# Altium PCB PCB1.PcbDoc (part 1 of 2)
Units mm, origin at the board's own origin, x right, y up, seen from the top; angles counter-clockwise.
Board outline 124.84 x 79.12 mm, 2 copper layers (Top Layer, Bottom Layer); 83 components, 68 nets, 287 pads, 46 vias.
Unrouted connection lines stored in the file: 3.
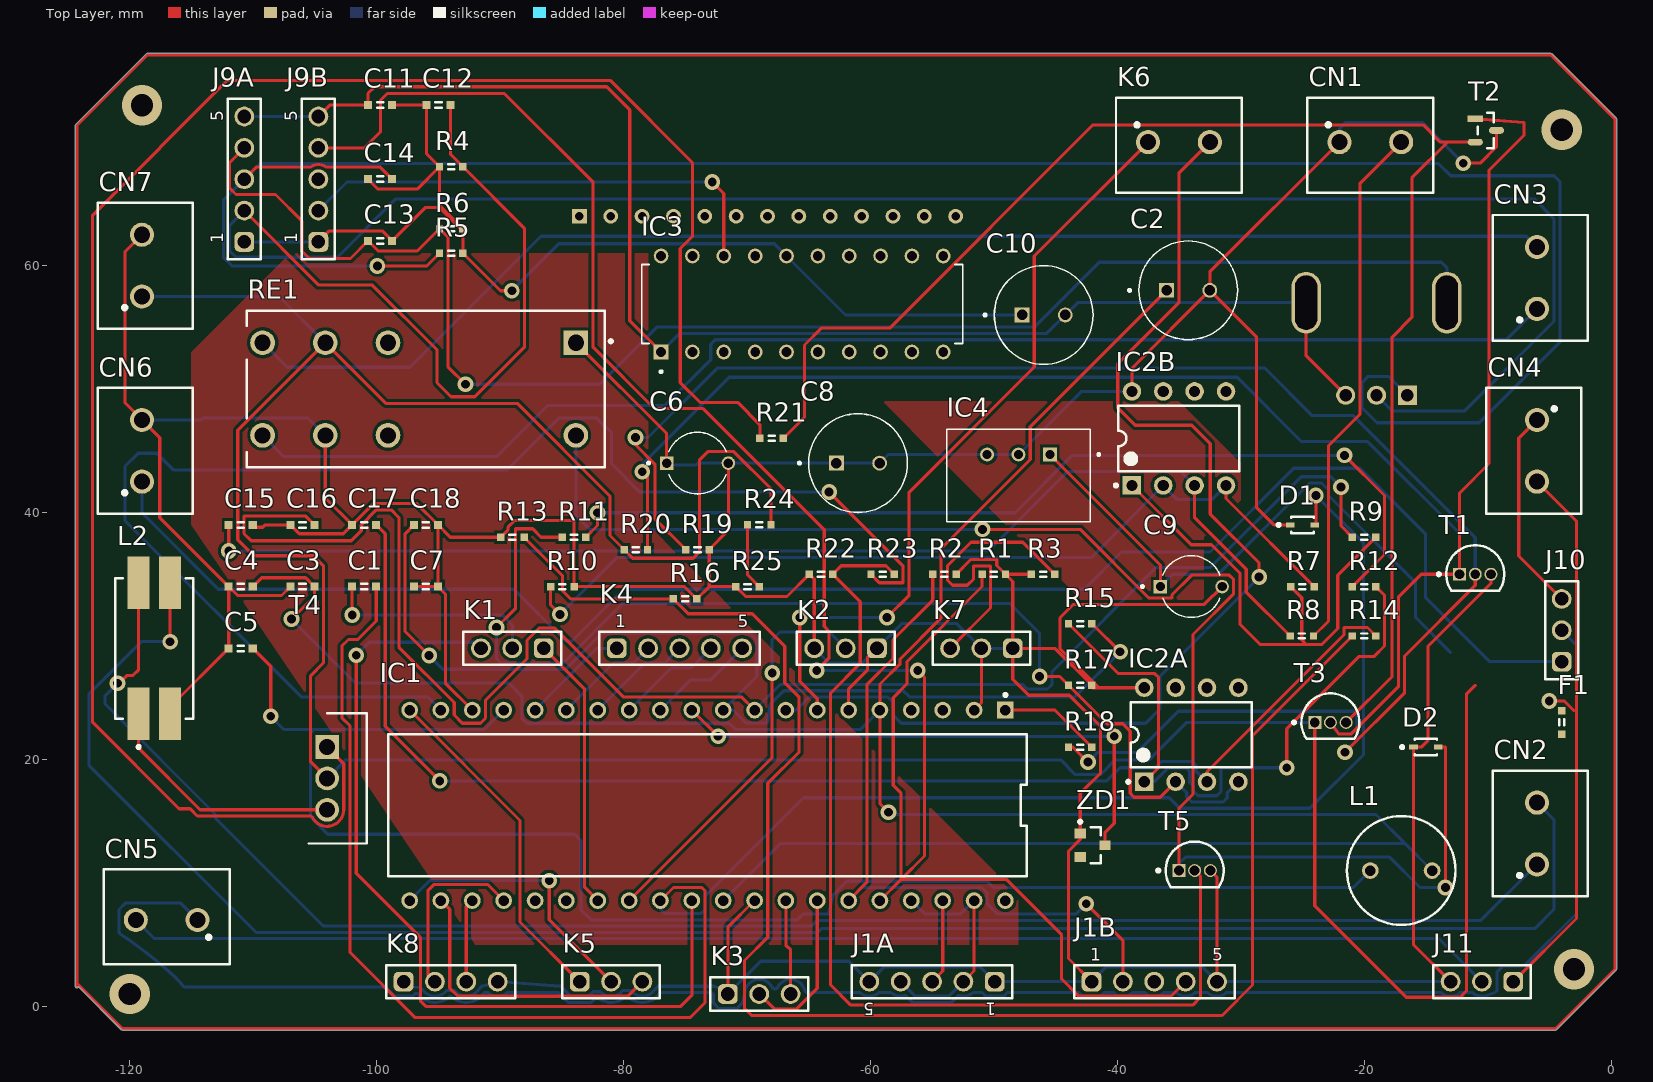
[diagram p0: Top Layer view]
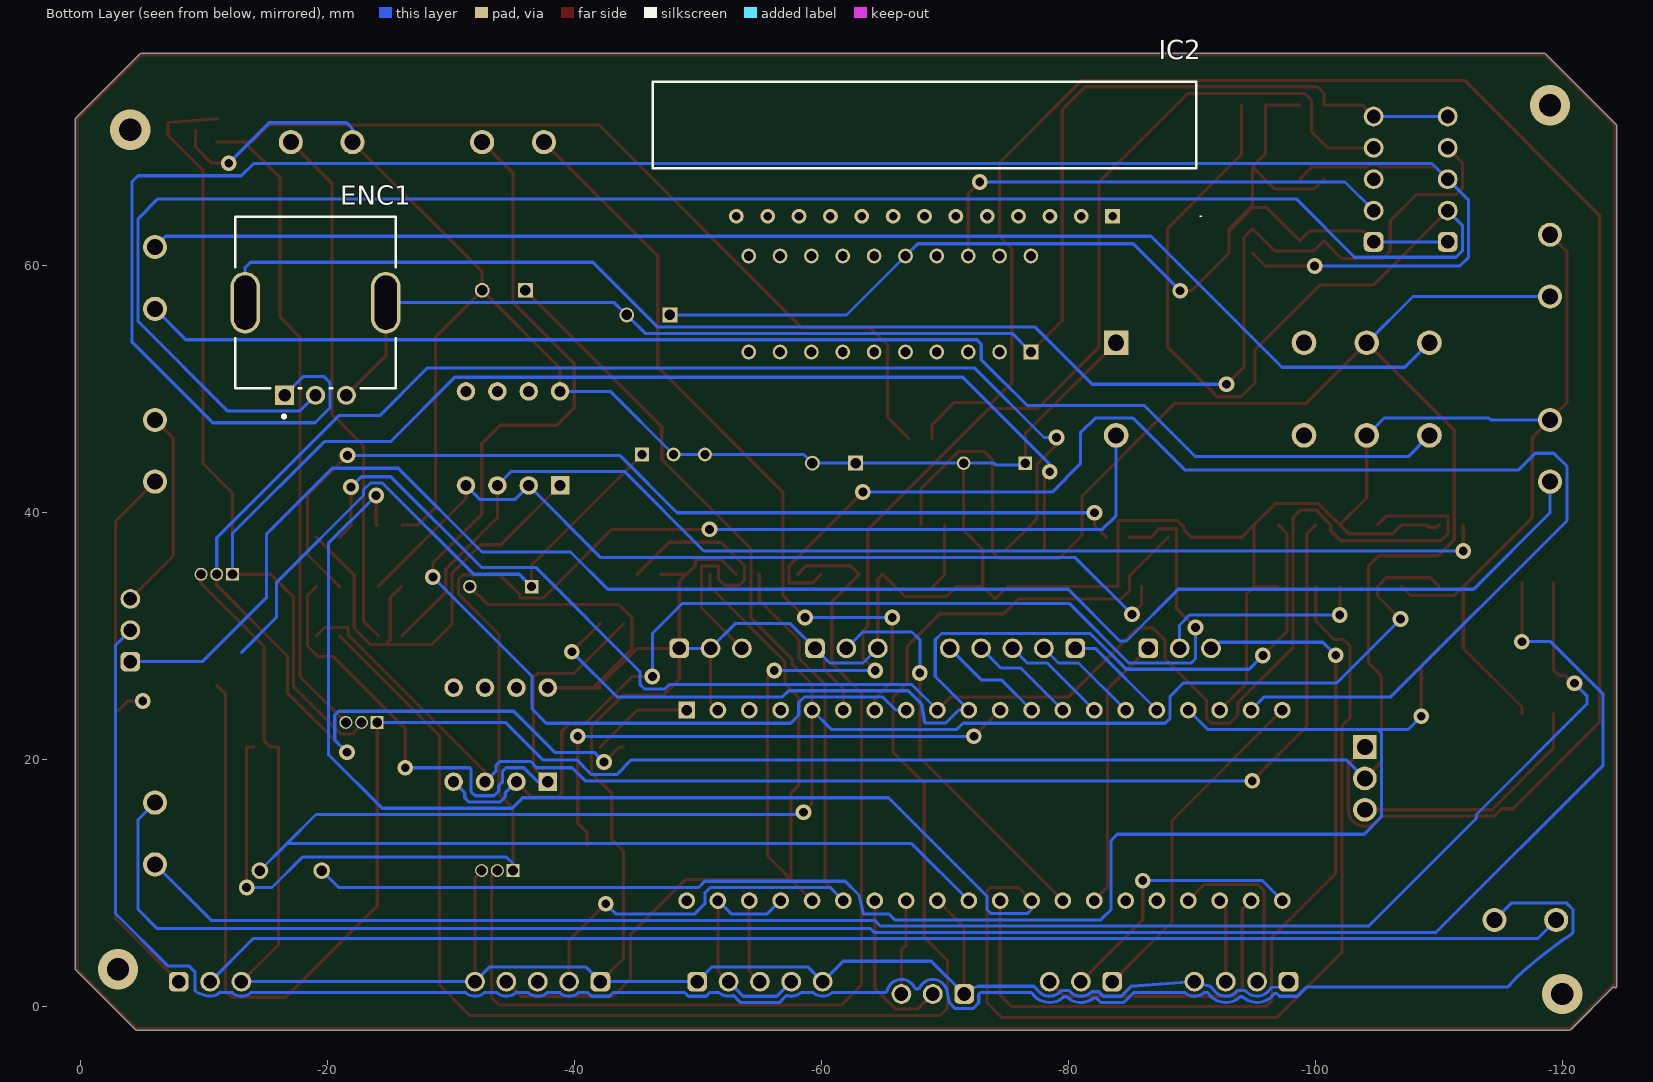
[diagram p1: Bottom Layer view, seen from below]
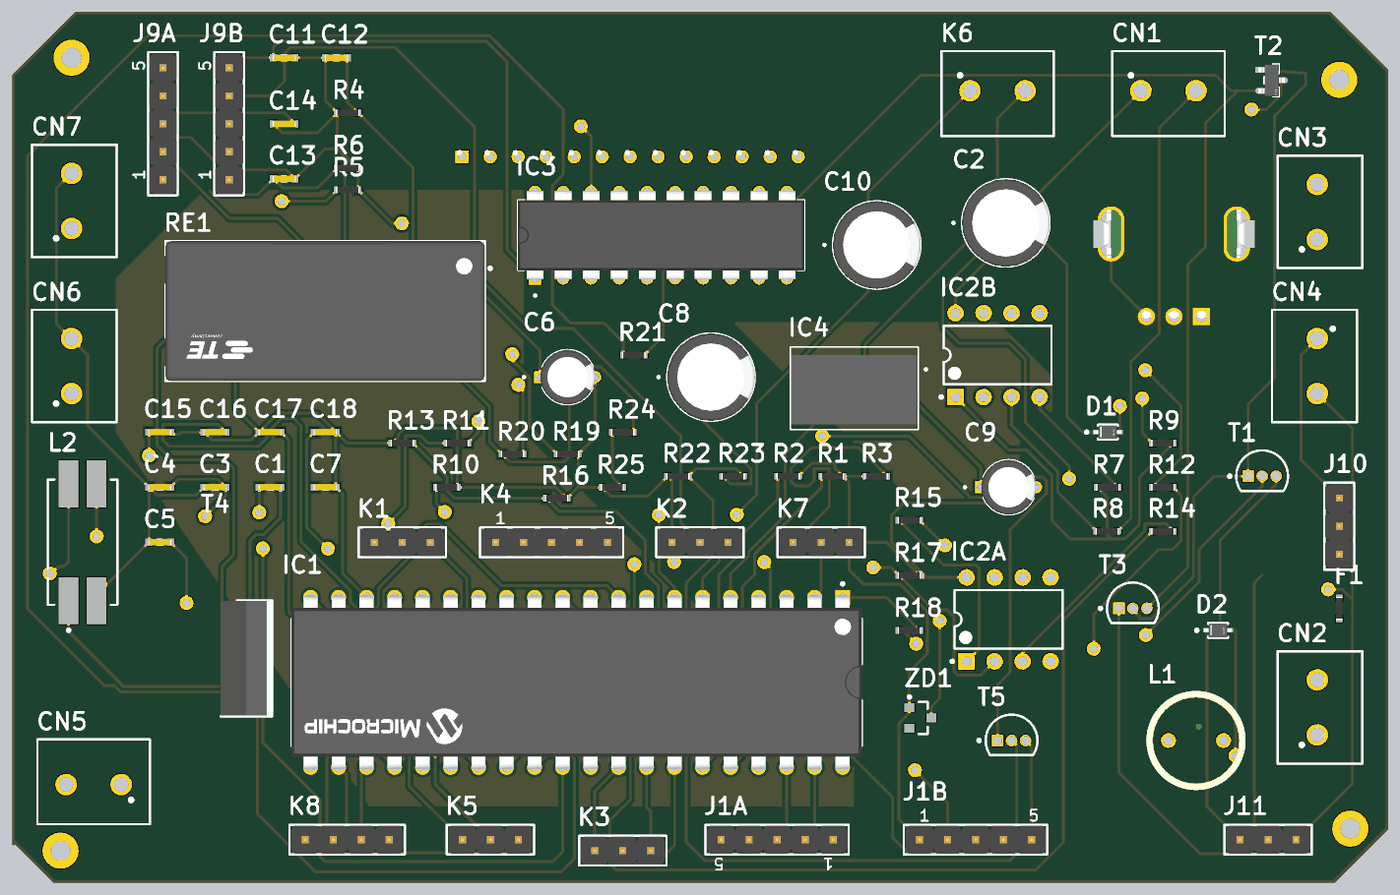
[diagram p2: 3D render of the assembled board from above, using the file's embedded part models]

## Layer stack, top to bottom
Top Solder: solder mask 0.0102, Solder Resist, Dk 3.5
Top Layer: signal copper 0.0356
Dielectric 1: dielectric 0.32, FR-4, Dk 4.8
Bottom Layer: signal copper 0.0356
Bottom Solder: solder mask 0.0102, Solder Resist, Dk 3.5

## Board outline
-124.392,1.625 ccw(c-124.265,1.625) -124.146,1.58 -120.672,-1.894 -120.582,-1.931 -4.504,-1.931 -4.414,-1.894 0.412,2.932 0.449,3.022 0.449,71.856 0.412,71.946 -4.795,77.153 -4.885,77.19 -118.55,77.19 -118.64,77.153 -124.355,71.438 -124.392,71.348

## Design rules (kind name [scope] priority, off if disabled: settings)
AcuteAngle AcuteAngle_1 [All] p1: minimum=0.00000000000000E+0000 checktracksonly=FALSE
BackDrilling BackDrilling_1 [All] p1: maxstublength=0.381 usetopbackdrill=TRUE usebottombackdrill=TRUE holeoversize=0.025 holetolplus=0 holetolminus=0
BoardOutlineClearance BoardOutlineClearance_1 [All] p1: gap=0.254 ignorepadtopadclearanceinfootprint=FALSE except(0: Arc-SplitContinuation Track-SplitContinuation SMDPad-SplitContinuation THPad-SplitContinuation Via-SplitContinuation Fill-SplitContinuation Poly-SplitContinuation Region-SplitContinuation Text-SplitContinuation)
Clearance Clearance_1 [All] p1: gap=0.254 ignorepadtopadclearanceinfootprint=TRUE except(0: Arc-Hole Track-Hole SMDPad-Hole THPad-Hole Via-Hole Fill-Hole Poly-Hole Region-Hole Text-Hole Hole-Hole)
Clearance Clearance_1 [OnMid vs OnMid] p2: gap=0.254 ignorepadtopadclearanceinfootprint=FALSE sourcerule=77 cellrowname=All cellrowtype=0 cellcolname=All cellcoltype=0 innerlayers=TRUE
Clearance Clearance_2 [(ExistsOnLayer('Top Layer') Or ExistsOnLayer('Bottom Layer')) vs (ExistsOnLayer('Top Layer') Or ExistsOnLayer('Bottom Layer'))] p3: gap=0.254 ignorepadtopadclearanceinfootprint=FALSE sourcerule=77 cellrowname=All cellrowtype=0 cellcolname=All cellcoltype=0 outerlayers=TRUE
Clearance [All] p4: gap=0.254 ignorepadtopadclearanceinfootprint=FALSE ismatrix=TRUE
ComponentClearance ComponentClearance_1 [All] p1: gap=0.254 collisioncheckmode=3 verticalgap=0.254 showdistances=FALSE
ComponentClearance [All] p2: gap=0.04 collisioncheckmode=3 verticalgap=0.254 showdistances=FALSE
ComponentOrientations ComponentRotations_1 [All] p1: allowedrotations=1
Creepage Creepage_1 [All] p1: checkdistance=0.254 applytopolygonpour=TRUE
FlightTimeFalling FlightTimeFallingEdge_1 [All] p1: maximum=1.000n
FlightTimeRising FlightTimeRisingEdge_1 [All] p1: maximum=1.000n
Length MaxMinLength_1 [All] p1: maxlimit=2540 minlimit=0
MatchedLengths MatchedLengths_1 [All] p1: tolerance=0 checknetsindiffpair=FALSE checkdiffpairvsdiffpair=TRUE checkxsignals=TRUE checkothers=TRUE
MaxMinImpedance MaxMinImpedance_1 [All] p1: minimum=1.000 maximum=10.00
MaximumViaCount MaximumViaCount_1 [All] p1: limit=1000
MinimumAnnularRing MinimumAnnularRing_1 [All] p1: minimumring=0.254
NetsToIgnore NetsToIgnore_1 [All] p1:
OvershootFalling OvershootFallingEdge_1 [All] p1: maximum=1.000
OvershootRising OvershootRisingEdge_1 [All] p1: maximum=1.000
ParallelSegment ParallelSegment_1 [All] p1: limit=0 gap=0
PermittedLayers PermittedLayers_1 [All] p1: toplayerpermitted=TRUE bottomlayerpermitted=TRUE
PlaneClearance PowerPlaneClearance_1 [All] p1: clearance=0
PlaneClearance [All] p2: clearance=0.508
PolygonConnect PolygonConnectStyle_1 [All] p1: thpad.connectstyle=Relief thpad.reliefconductorwidth=0.254 thpad.reliefentries=2 thpad.polygonreliefangle="0 Angle" thpad.airgapwidth=0.254 smdpad.connectstyle=Relief smdpad.reliefconductorwidth=0.254 smdpad.reliefentries=2 smdpad.polygonreliefangle="0 Angle" smdpad.airgapwidth=0.254 via.connectstyle=Direct via.reliefconductorwidth=0.254 via.reliefentries=2 via.polygonreliefangle="0 Angle" via.airgapwidth=0.254
PolygonConnect [All] p2: connectstyle=Relief reliefconductorwidth=0.254 reliefentries=4 polygonreliefangle="90 Angle" airgapwidth=0.254
ReturnPath ReturnPath_1 [All] p1: _gaplimit=0
RoomDefinition Display [InComponentClass('Display')] p1: confinementstyle=ConfineIn formatcopy=TRUE lockcomponents=FALSE outline -113.71,27 -11,27 -11,77 -113.71,77
RoutingVias RoutingViaStyle_1 [All] p1: holewidth=0.6 width=1.1 viastyle="Through Hole" minholewidth=0.6 minwidth=1.1 maxholewidth=0.6 maxwidth=1.1
RoutingVias [All] p2: holewidth=0.711 width=1.27 viastyle="Through Hole" minholewidth=0.711 minwidth=1.27 maxholewidth=0.711 maxwidth=1.27
SMDEntry SMDPADEntry_1 [All] p1: side=TRUE corner=TRUE anyangle=FALSE
SMDNeckDown SMDNeckDown_1 [All] p1: percent=50.000
SMDToCorner SMDToCorner_1 [All] p1: distance=0
SMDToPlane SMDToPlane_1 [All] p1: distance=0
SignalBaseValue SignalBaseValue_1 [All] p1: maximum=0.000
SignalStimulus SignalStimulus_1 [All] p1: kind=0 level=0 starttime=0.000 stoptime=0.000 periodtime=0.000
SignalTopValue SignalTopValue_1 [All] p1: minimum=5.000
SlopeFalling MaxSlopeFallingEdge_1 [All] p1: maxslope=1.000n
SlopeRising MaxSlopeRisingEdge_1 [All] p1: maxslope=0.000
SolderMaskExpansion [All] p1: expansion=0.102 istentingtop=FALSE
StubLength DaisyChainStubLength_1 [All] p1: limit=25.4
SupplyNets SupplyNets_1 [All] p1: voltage=0.000
UnConnectedPin UnconnectedPin_1 [All] p1:
UndershootFalling UndershootFallingEdge_1 [All] p1: maximum=1.000
UndershootRising UndershootRisingEdge_1 [All] p1: maximum=1.000
ViasUnderSMD ViasUnderSMD_1 [All] p1: allowed=FALSE
Width MaxMinWidth_2 [All] p1: maxlimit=0.508 minlimit=0.508 preferedwidth=0.508 minimp=50.000000 maximp=50.000000 favimp=50.000000
Width MaxMinWidth_1 [All] p2: maxlimit=0.254 minlimit=0.254 preferedwidth=0.254
Width [All] p3: maxlimit=0.254 minlimit=0.254 preferedwidth=0.254
28 further rules are at their usual default settings.

## Classes and differential pairs
component class TermoCouple: C15 C16 C17 C18 CN1 IC2A IC2B R7 R8 R9 R10 R11 R12 R13 R14 R15 R16 R17
component class PWU: CN2 L2 R18 R19 R20 R21 T1 T2 T3 T4
component class PowerSupply: C8 C9 CN3 CN4 CN5 CN6 CN7 D2 F1 IC4 J10 J11 R22 R23 R24 R25 RE1 T5 ZD1
component class Display: C10 C11 C12 C13 C14 ENC1 IC2 IC3 J9A J9B R4 R5 R6
component class CPU: C1 C2 C3 C4 C5 C6 C7 D1 IC1 J1A J1B K1 K2 K3 K4 K5 K6 K7 K8 L1 R1 R2 R3

## Components (designator, comment, footprint, x,y, rotation, side; value= is the part's Value field where it differs from the comment)
C1 "100nF" CAP_0805 -101,34 r0 top
C2 "10uF" CAPPRD350W60D800H1150 -34.25,58 r0 top
C3 "100nF" CAP_0805 -106,34 r0 top
C4 "100nF" CAP_0805 -111,34 r0 top
C5 "100nF" CAP_0805 -111,29 r0 top
C6 "10uF 50v" CAPPRD500W50D500H1100 -74,44 r0 top
C7 "CAP_0805" CAP_0805 -96,34 r0 top
C8 "10uF 50V" CAPPRD350W60D800H1150 -61,44 r0 top
C9 "100uF 25V" CAPPRD500W50D500H1100 -34,34 r0 top
C10 "100uF" CAPPRD350W60D800H1150 -45.96,56 r0 top
C11 "100n" CAP_0805 -99.71,73 r0 top
C12 "10n" CAP_0805 -94.975,73 r180 top
C13 "10n" CAP_0805 -99.71,62 r180 top
C14 "10n" CAP_0805 -99.71,67 r180 top
C15 "10n" CAP_0805 -111,39 r180 top
C16 "10n" CAP_0805 -106,39 r180 top
C17 "10n" CAP_0805 -101,39 r180 top
C18 "10n" CAP_0805 -96,39 r180 top
CN1 "connecters 2pins" "conncecto 2 pins" -19.5,70 r0 top
CN2 "connecters 2pins" "conncecto 2 pins" -6,14 r90 top
CN3 "connecters 2pins" "conncecto 2 pins" -6,59 r90 top
CN4 "connecters 2pins" "conncecto 2 pins" -6,45 r270 top
CN5 "connecters 2pins" "conncecto 2 pins" -117,7 r180 top
CN6 "connecters 2pins" "conncecto 2 pins" -119,45 r90 top
CN7 "connecters 2pins" "conncecto 2 pins" -119,60 r90 top
D1 "1N4148WSF-7" FP-SOD323F-MFG -25,39 r0 top
D2 "1N4007" FP-SOD323F-MFG -15,21 r0 top
ENC1 "PEC11R-4015F-N0024" FP-PEC11R-4015F-N0024-MFG -19,57 r180 bottom
F1 "RES_0805" RES_0805 -4,23 r90 top
IC1 "ATMEGA4809-PF" FP-C04-016-MFG -73.19,16.285 r270 top
IC2 "KW4-801AVB" LTC46454G -83.57,64 r0 bottom
IC2A "MCP6002-E/P" PDIP300-P8 -34,22 r90 top
IC2B "MCP6002-E/P" PDIP300-P8 -35,46 r90 top
IC3 "TM1637" DIP778W43P254L2612H431Q20N -65.52,56.89 r90 top
IC4 "DC/DC converters" CONV_TSR_1-2450E -48,43 r180 top
J1A "61300511121" 61300511121 -55,2 r180 top
J1B "61300511121" 61300511121 -37,2 r0 top
J9A "61300511121" 61300511121 -110.71,67 r90 top
J9B "61300511121" 61300511121 -104.71,67 r90 top
J10 "61300311121" 61300311121 -4,30.46 r90 top
J11 "61300311121" 61300311121 -10.46,2 r180 top
K1 "61300311121" 61300311121 -89,29 r180 top
K2 "61300311121" 61300311121 -62,29 r180 top
K3 "61300311121" 61300311121 -69,1 r0 top
K4 "61300511121" 61300511121 -75.46,29 r0 top
K5 "61300311121" 61300311121 -81,2 r0 top
K6 "connecters 2pins" "conncecto 2 pins" -35,70 r0 top
K7 "61300311121" 61300311121 -51,29 r180 top
K8 "61300411121" 61300411121 -94,2 r0 top
L1 "RFB0807-103L" COIL-RFB0807-2_V -17,11 r0 top
L2 "CM2545X171R-10" LIRD-CM2545X171R-10_V -118,29 r90 top
R1 "4k7" RES_0805 -50,35 r0 top
R2 "4k7" RES_0805 -54,35 r0 top
R3 "4k7" RES_0805 -46,35 r0 top
R4 "10k" RES_0805 -93.95,68 r0 top
R5 "10k" RES_0805 -93.95,61 r0 top
R6 "10k" RES_0805 -93.95,63 r0 top
R7 "18k" RES_0805 -25,34 r0 top
R8 "5k6" RES_0805 -25.05,30 r0 top
R9 "5k6" RES_0805 -20,38 r0 top
R10 "100E" RES_0805 -84.95,34 r180 top
R11 "18k" RES_0805 -84,38 r180 top
R12 "18k" RES_0805 -20,34 r180 top
R13 "1M" RES_0805 -89,38 r180 top
R14 "5k6" RES_0805 -20,30 r180 top
R15 "5k6" RES_0805 -43,31 r180 top
R16 "10M" RES_0805 -75,33 r180 top
R17 "100E" RES_0805 -43,26 r180 top
R18 "10k" RES_0805 -43,21 r180 top
R19 "4.7k" RES_0805 -74,37 r180 top
R20 "4.7k" RES_0805 -79,37 r180 top
R21 "100E" RES_0805 -68,46 r180 top
R22 "4.7k" RES_0805 -64,35 r180 top
R23 "10k" RES_0805 -59,35 r180 top
R24 "6.8k" RES_0805 -69,39 r180 top
R25 "10k" RES_0805 -69.95,34 r180 top
RE1 "RT424005F" FP-RT424005F-MFG -96,50 r180 top
T1 "BC547CG" ONSC-TO-92-3-29-11 -11,35 r0 top
T2 "BCV26" FP-318-IPC_C -10.14,70.95 r0 top
T3 "BC547CG" ONSC-TO-92-3-29-11 -22.73,23 r0 top
T4 "Mosfet" TO254P469X1042X1967-3P -104,21 r270 top
T5 "BC847B" ONSC-TO-92-3-29-11 -33.73,11 r0 top
ZD1 "5V1" ONSC-SOT-23-3-318-08_V -42,13.05 r0 top

## Footprints (in the part's own frame and the unit in brackets; to place one, negate y for a bottom-side part, rotate by r counter-clockwise, add the part's x,y. Pads: shape width x height; smd on the part's side, far side on the other; paste and mask are expansions set on the pad)
61300311121 [mm] "Pin Header, pitch 2.54 mm, THT, Vertical, single row, 3p"
  rrect50% 1.6x1.6 hole 1.1: 1(-2.54,0)
  round 1.6 hole 1.1: 2(0,0) 3(2.54,0)
  silkscreen extent -3.96,-1.35 3.96,1.34, body extent -3.81,-1.27 3.81,1.27, height 8.57
61300411121 [mm] "Pin Header, pitch 2.54 mm, THT, Vertical, single row, 4p"
  rrect50% 1.6x1.6 hole 1.1: 1(-3.81,0)
  round 1.6 hole 1.1: 2(-1.27,0) 3(1.27,0) 4(3.81,0)
  silkscreen extent -5.23,-1.34 5.23,1.34, body extent -5.08,-1.27 5.08,1.27, height 8.57
61300511121 [mm] "Pin Header, pitch 2.54 mm, THT, Vertical, single row, 5p"
  rrect50% 1.6x1.6 hole 1.1: 1(-5.08,0)
  round 1.6 hole 1.1: 2(-2.54,0) 3(0,0) 4(2.54,0) 5(5.08,0)
  silkscreen extent -6.5,-1.34 6.5,1.34, body extent -6.35,-1.27 6.35,1.27, height 8.57
CAP_0805 [mm] "Chip Capacitor, 2-Leads, Body 2.00x0.50mm, IPC Medium Density"
  rect 0.65x0.65 smd: 1(-0.975,0) 2(0.975,0)
  silkscreen extent -0.25,-0.23 0.25,0.22, body extent -1.05,-0.3 1.05,0.3, height 0.6
CAPPRD350W60D800H1150 [mm]
  round 1.2 hole 0.85: N(1.75,0)
  rect 1.2x1.2 hole 0.85: P(-1.75,0)
  silkscreen extent -4.85,-4 4,4, body extent -4,-4 4,4, height 11.5
CAPPRD500W50D500H1100 [mm]
  round 1.1 hole 0.75: N(2.5,0)
  rect 1.1x1.1 hole 0.75: P(-2.5,0)
  silkscreen extent -4.06,-2.5 2.32,2.5, body extent -2.75,-2.5 2.75,2.5, height 11
COIL-RFB0807-2_V [mm] "Radial Leaded, 2-Leads, Dia 8.8mm, Height 7.5mm, Pin Spacing 5mm"
  round 1.35 hole 0.85: 1(-2.5,0) 2(2.5,0)
  silkscreen extent -4.4,-4.4 4.4,4.4, body extent -4.41,-4.41 4.41,4.41, height 7.5
"conncecto 2 pins" [mm]
  round 1.95 hole 1.3: 1(-2.5,0) 2(2.5,0)
  silkscreen extent -5.1,-4.1 5.1,3.6
CONV_TSR_1-2450E [mm]
  rect 1.13x1.13 hole 0.73: 1(-2.54,-1.7)
  round 1.13 hole 0.73: 2(0,-1.7) 3(2.54,-1.7)
  silkscreen extent -6.6,-3.75 5.8,3.75, body extent -5.69,-3.02 5.69,3.28, height 9.6
DIP778W43P254L2612H431Q20N [mm]
  rect 1.19x1.19 hole 0.79: 1(-3.89,11.43)
  round 1.19 hole 0.79: 2(-3.89,8.89) 3(-3.89,6.35) 4(-3.89,3.81) 5(-3.89,1.27) 6(-3.89,-1.27) 7(-3.89,-3.81) 8(-3.89,-6.35) 9(-3.89,-8.89) 10(-3.89,-11.43) 11(3.89,-11.43) 12(3.89,-8.89) 13(3.89,-6.35) 14(3.89,-3.81) 15(3.89,-1.27) 16(3.89,1.27) 17(3.89,3.81) 18(3.89,6.35) 19(3.89,8.89) 20(3.89,11.43)
  silkscreen extent -5.58,-13 3.2,13, body extent -4.03,-13 4.03,13, height 4.31
FP-318-IPC_C [mm]
  rect 1.224x0.538 smd paste+0 mask+0: 1(-0.86,0.95)
  rrect100% 1.224x0.538 smd paste+0 mask+0: 2(-0.86,-0.95) 3(0.86,0)
  silkscreen extent -0.65,-1.45 0.65,1.45, body extent -1.57,-1.55 1.57,1.55, height 0.25
FP-C04-016-MFG [mm]
  rect 1.35x1.35 hole 0.85 paste-2539.97 mask+0: 1(-7.715,24.13)
  round 1.35 hole 0.85 paste-2539.97 mask+0: 2(-7.715,21.59) 3(-7.715,19.05) 4(-7.715,16.51) 5(-7.715,13.97) 6(-7.715,11.43) 7(-7.715,8.89) 8(-7.715,6.35) 9(-7.715,3.81) 10(-7.715,1.27) 11(-7.715,-1.27) 12(-7.715,-3.81) 13(-7.715,-6.35) 14(-7.715,-8.89) 15(-7.715,-11.43) 16(-7.715,-13.97) 17(-7.715,-16.51) 18(-7.715,-19.05) 19(-7.715,-21.59) 20(-7.715,-24.13) 21(7.715,-24.13) 22(7.715,-21.59) 23(7.715,-19.05) 24(7.715,-16.51) 25(7.715,-13.97) 26(7.715,-11.43) 27(7.715,-8.89) 28(7.715,-6.35) 29(7.715,-3.81) 30(7.715,-1.27) 31(7.715,1.27) 32(7.715,3.81) 33(7.715,6.35) 34(7.715,8.89) 35(7.715,11.43) 36(7.715,13.97) 37(7.715,16.51) 38(7.715,19.05) 39(7.715,21.59) 40(7.715,24.13)
  silkscreen extent -9.07,-25.88 5.76,25.88, body extent -8.49,-26.71 8.49,26.71, height 0.25
FP-PEC11R-4015F-N0024-MFG [mm]
  rrect100% 2.4x5 hole 4.4 slot 1.8 at 0 deg paste-2539.97 mask+0: 1(-5.7,0) 2(5.7,0)
  rect 1.55x1.55 hole 1 paste-2539.97 mask+0: A(-2.5,-7.5)
  round 1.55 hole 1 paste-2539.97 mask+0: B(2.5,-7.5) C(0,-7.5)
  silkscreen extent -6.5,-9.35 6.5,6.95, body extent -7.33,-7.7 7.33,6.6, height 22.3
FP-RT424005F-MFG [mm]
  round 2 hole 1.3 paste-2539.97 mask+0: 11(8.15,-3.75) 12(3.07,-3.75) 14(13.23,-3.75) 21(8.15,3.75) 22(3.07,3.75) 24(13.23,3.75) A2(-12.15,3.75)
  rect 2x2 hole 1.3 paste-2539.97 mask+0: A1(-12.15,-3.75)
  silkscreen extent -15.1,-6.35 14.5,6.35, body extent -14.6,-6.45 14.6,6.45, height 0.25
FP-SOD323F-MFG [mm]
  rect 0.71x0.403 smd paste+0 mask+0: 1(-0.995,0) 2(0.995,0)
  silkscreen extent -2.05,-0.67 0.9,0.68, body extent -1.45,-0.77 1.45,0.77, height 0.25
LIRD-CM2545X171R-10_V [mm] "SMD, 4-Leads, Body 11.38x6.3mm"
  rect 4.27x1.78 smd: 1(-5.305,1.27) 2(-5.305,-1.27) 3(5.305,-1.27) 4(5.305,1.27)
  silkscreen extent -8.11,-3.15 5.69,3.15, body extent -5.69,-3.15 5.69,3.15, height 10.16
LTC46454G [mm]
  rect 1.2x1.2 hole 0.7: 1(0,0)
  round 1.2 hole 0.7: 2(2.54,0) 3(5.08,0) 4(7.62,0) 5(10.16,0) 6(12.7,0) 7(15.24,0) 8(17.78,0) 9(20.32,0) 10(22.86,0) 11(25.4,0) 12(27.94,0) 13(30.48,0)
  silkscreen extent -7.2,-10.9 37.24,0.05, body extent -7.01,-11.28 36.99,-0.13, height 16.35
ONSC-SOT-23-3-318-08_V [mm] "SOT23, 3-Leads, Body 2.92x1.3mm, Pitch 0.95mm"
  rect 0.9x0.8 smd: 1(-1,0.95) 2(-1,-0.95) 3(1,0)
  silkscreen extent -1.12,-1.46 0.65,2.02, body extent -0.65,-1.46 0.65,1.46, height 1.11
ONSC-TO-92-3-29-11 [mm] "TO, 3-Leads, Body Dia 4.7mm, Pitch 1.27mm"
  rect 1.05x1.05 hole 0.8: 1(-1.27,0)
  round 1.05 hole 0.8: 2(0,0) 3(1.27,0)
  silkscreen extent -3.07,-1.34 2.35,2.35, body extent -2.35,-1.33 2.36,2.36, height 7.87
PDIP300-P8 [mm] "8-Pin Plastic Dual In-Line Package (PDIP)"
  rect 1.5x1.5 hole 0.9: 1(-3.81,3.81)
  round 1.5 hole 0.9: 2(-3.81,1.27) 3(-3.81,-1.27) 4(-3.81,-3.81) 5(3.81,-3.81) 6(3.81,-1.27) 7(3.81,1.27) 8(3.81,3.81)
  silkscreen extent -3.93,-4.9 2.65,5.23, body extent -3.55,-4.9 3.55,4.9, height 4.32
RES_0805 [mm] "Chip Resistor, 2-Leads, Body 2.00x0.50mm, IPC Medium Density"
  rect 0.6x0.6 smd: 1(-0.95,0) 2(0.95,0)
  silkscreen extent -0.25,-0.2 0.25,0.2, body extent -1.05,-0.3 1.05,0.3, height 0.6
TO254P469X1042X1967-3P [mm]
  rect 1.92x1.92 / inner round 1.92 / far side rect 1.92x1.92 hole 1.28: 1(0,0)
  round 1.92 hole 1.28: 2(2.54,0) 3(5.08,0)
  silkscreen extent -2.73,-1.5 7.81,3.19, body extent -10,-3.38 10,3.38, height 5.8

## Part data
C1 C3 C4 C5 C11 C12 C13 C14 C15 C16 C17 C18: library part CAP_0805, "Capacitor SMD 0805 generic."
C2 C8 C10: library part Capacitor, "Capacitor 100 μF, 50 V, steek 3,5 mm, 8x11 mm, generic."
C6 C9: library part Capacitor_1, "Capacitor, 10 μF, 50 V, steek 2 mm, 5x11 mm, generic."
C7: "Capacitor SMD 0805 generic."
CN1 CN2 CN3 CN4 CN5 CN6 CN7 K6: library part pins, "printkroonsteen 5,08 mm,"
D1: "Rectifier Diode, 1 Phase, 1 Element, 0.25A, 100V V(RRM), Silicon", Manufacturer=Diodes, Max Operating Temperature=150°C, Max Output current=250mA, Max Power Dissipation=400mW, Min Operating Temperature=-55°C, Package Body Material=Plastic, Package Shape=Rectangular, Package Style="SMALL OUTLINEMeter", Rep Pk Reverse Voltage-Max=100V, Supplier Part Number=4050038, Category="Rectifier Diodes", ComponentLink1Description=https://datasheet.ciiva.com:443/pdfs/VipMasterIC/IC/DIOD/DIODS20288/DIODS20288-1.pdf?src-supplier=IHS+Markit, ComponentLink1URL=https://datasheet.ciiva.com:443/pdfs/VipMasterIC/IC/DIOD/DIODS20288/DIODS20288-1.pdf?src-supplier=IHS+Markit, ComponentLink2Description=https://datasheet.ciiva.com/29592/1n4148wsf-29592065.pdf?src-supplier=Digikey, ComponentLink2URL=https://datasheet.ciiva.com/29592/1n4148wsf-29592065.pdf?src-supplier=Digikey, Diode Element Material=SILICON, Diode Type=RECTIFIER, JESD-30 Code=R-PDSO-F2, JESD-609 Code=e3, Manufacturer Part Number=1N4148WSF-7, Number of Elements=1, Pins=2, Pricing="3000=0.0178, 12000=0.0171, 45000=0.0164, 90000=0.0161, 225000=0.0153 (USD)", Reach SVHC Compliant=Yes, Reverse Recovery Time-Max=0.004us, RoHS=Yes, RoHS Compliant=Yes, Stock=36000, Supplier="Future Electronics", Surface Mount=Yes, Terminal Finish=Tin, Terminal Form=Flat, Terminal Position=DUAL
D2: library part 1N4148WSF-7, "Rectifier Diode, 1 Phase, 1 Element, 0.25A, 100V V(RRM), Silicon", Manufacturer=Diodes, Max Operating Temperature=150°C, Max Output current=250mA, Max Power Dissipation=400mW, Min Operating Temperature=-55°C, Package Body Material=Plastic, Package Shape=Rectangular, Package Style="SMALL OUTLINEMeter", Rep Pk Reverse Voltage-Max=100V, Supplier Part Number=4050038, Category="Rectifier Diodes", ComponentLink1Description=https://datasheet.ciiva.com:443/pdfs/VipMasterIC/IC/DIOD/DIODS20288/DIODS20288-1.pdf?src-supplier=IHS+Markit, ComponentLink1URL=https://datasheet.ciiva.com:443/pdfs/VipMasterIC/IC/DIOD/DIODS20288/DIODS20288-1.pdf?src-supplier=IHS+Markit, ComponentLink2Description=https://datasheet.ciiva.com/29592/1n4148wsf-29592065.pdf?src-supplier=Digikey, ComponentLink2URL=https://datasheet.ciiva.com/29592/1n4148wsf-29592065.pdf?src-supplier=Digikey, Diode Element Material=SILICON, Diode Type=RECTIFIER, JESD-30 Code=R-PDSO-F2, JESD-609 Code=e3, Manufacturer Part Number=1N4148WSF-7, Number of Elements=1, Pins=2, Pricing="3000=0.0178, 12000=0.0171, 45000=0.0164, 90000=0.0161, 225000=0.0153 (USD)", Reach SVHC Compliant=Yes, Reverse Recovery Time-Max=0.004us, RoHS=Yes, RoHS Compliant=Yes, Stock=36000, Supplier="Future Electronics", Surface Mount=Yes, Terminal Finish=Tin, Terminal Form=Flat, Terminal Position=DUAL
ENC1: library part CMP-07421-000003-1, "ROTARY ENCODER MECHANICAL 24PPR", Current Rating=10mA, Manufacturer=Bourns, Package=0, Temperature="-30°C to +70°C", Temperature Range High=+70°C, Temperature Range Low=-30°C, Voltage Rating Dc=5V, Automotive=No, Category=Enc, ComponentLink2Description=Datasheet, ComponentLink2URL=https://www.bourns.com/docs/product-datasheets/pec11r.pdf?sfvrsn=bb617cbf_7, Conn Orientation=Vertical, Detent=No, Device Class L1=Electromechanical, Device Class L2=Switches, Device Class L3=Encoders, Digikey Description="ROTARY ENCODER MECHANICAL 24PPR", Encoder Type=Incremental, Height=22.3mm, Lead Free=Yes, Manufacturer Part Number=PEC11R-4015F-N0024, Mouser Description="Encoders 15mm SHAFT NO SWITCH", Number Of Circuits=1, Octopart=https://octopart.com/pec11r-4015f-n0024-bourns-26648251, Pulses Per Rev=24, RoHS=TRUE
F1: "SMD size 0805 Generic."
IC2: "SEVEN_SEG Diplay 4digits"
IC2A IC2B: "Operational Amplifier, 2 Func, 4500uV Offset-Max, CMOS, PDIP8", Case/Package=DIP, Frequency Compensation=YES, Input Offset Voltage-Max=4.5mV, Manufacturer=Microchip, Max Operating Temperature=125°C, Max Supply Current=340uA, Micropower=Yes, Min Operating Temperature=-40°C, Nominal Supply Voltage=5V, Package Body Material=Plastic, Package Equivalence Code=SOLCC8,.11,20, Package Shape=Rectangular, Package Style=IN-LINEMeter, Power=No, Power Supplies=2.5V, Supplier Part Number=88H9855, Supply Voltage Limit-Max=7V, Temperature Grade=AUTOMOTIVE, Voltage Gain-Min=25110, Amplifier Type="OPERATIONAL AMPLIFIER", Architecture=VOLTAGE-FEEDBACK, Category="Amplifiers - Op Amps, Buffer, Instrumentation", Channels=2, Common-mode Reject Ratio-Nom=76dB, ComponentLink1Description=https://datasheet.ciiva.com:443/pdfs/VipMasterIC/IC/MCHP/MCHP-S-A0010037088/MCHP-S-A0010037127-1.pdf?src-supplier=IHS+Markit, ComponentLink1URL=https://datasheet.ciiva.com:443/pdfs/VipMasterIC/IC/MCHP/MCHP-S-A0010037088/MCHP-S-A0010037127-1.pdf?src-supplier=IHS+Markit, ComponentLink2Description=https://datasheet.ciiva.com/19474/1285888-19474433.pdf?src-supplier=Jameco, ComponentLink2URL=https://datasheet.ciiva.com/19474/1285888-19474433.pdf?src-supplier=Jameco, ComponentLink3Description=https://datasheet.ciiva.com/26922/getdatasheetpartid-772743-26922641.pdf?src-supplier=Verical, ComponentLink3URL=https://datasheet.ciiva.com/26922/getdatasheetpartid-772743-26922641.pdf?src-supplier=Verical, ComponentLink4Description=https://datasheet.ciiva.com/16347/filehandler-aspxddocname-en011705-16347733.pdf?src-supplier=Future+Electronics, ComponentLink4URL=https://datasheet.ciiva.com/16347/filehandler-aspxddocname-en011705-16347733.pdf?src-supplier=Future+Electronics, ComponentLink5Description=https://datasheet.ciiva.com/7653/524878-7653495.pdf?src-supplier=Element14, ComponentLink5URL=https://datasheet.ciiva.com/7653/524878-7653495.pdf?src-supplier=Element14, ComponentLink6Description=https://datasheet.ciiva.com/14151/bsmicrochip-op-verstaerker-mcp600-en-14151451.pdf?src-supplier=Distrelec, ComponentLink6URL=https://datasheet.ciiva.com/14151/bsmicrochip-op-verstaerker-mcp600-en-14151451.pdf?src-supplier=Distrelec, ComponentLink7Description=https://datasheet.ciiva.com/11706/jp011705-11706855.pdf?src-supplier=Avnet, ComponentLink7URL=https://datasheet.ciiva.com/11706/jp011705-11706855.pdf?src-supplier=Avnet, ComponentLink8Description=https://datasheet.ciiva.com/1802/21733j-1802727.pdf?src-supplier=Digikey, ComponentLink8URL=https://datasheet.ciiva.com/1802/21733j-1802727.pdf?src-supplier=Digikey, ComponentLink9Description=https://datasheet.ciiva.com/4758/21733e-41017-4758151.pdf?src-supplier=Mouser, ComponentLink9URL=https://datasheet.ciiva.com/4758/21733e-41017-4758151.pdf?src-supplier=Mouser, Height - Seated (Max)=5.33mm, JESD-30 Code=R-PDIP-T8, JESD-609 Code=e3, Length=9.271mm, Low-Bias=No, Low-Offset=No, Manufacturer Part Number=MCP6002-E/P, Pins=8, Pricing="1=0.377 (USD)", Programmable Power=No, Qualification Status="Not Qualified", Reach SVHC Compliant=Yes, RoHS=Yes, RoHS Compliant=Yes, Slew Rate=0.6V/µs, Stock=25, Supplier=Avnet, Surface Mount=No, Technology=CMOS, Terminal Finish=Tin, Terminal Form="Through Hole", Terminal Pitch=2.54mm, Terminal Position=DUAL, Unity Gain BW-Nom=1MHz, Wideband=No, Width=7.62mm
J1A J1B J9A J9B K4: "Board Connector, 5 Contact(s), 1 Row(s), Male, Straight, 0.1 inch Pitch, Solder Terminal, Locking, Black Insulator, Plug", Contact Resistance=20mR, Dielectric Withstanding Voltage (AC)=500V, Insulation Color=Black, Insulation Resistance=1GR, Manufacturer="Wurth Electronics", Max Operating Temperature=125°C, Min Operating Temperature=-40°C, Rated Current (Signal)=3A, Supplier Part Number=8281597P, Body Breadth=0.1inch, Body Depth=0.1inch, Body Length=0.5inch, Body/Shell Style=PLUG, Category="Headers and Wire Housings", ComponentLink1Description=https://datasheet.ciiva.com:443/pdfs/VipMasterIC/IC/MIDC/MIDCS07676/MIDCS07676-1.pdf?src-supplier=IHS+Markit, ComponentLink1URL=https://datasheet.ciiva.com:443/pdfs/VipMasterIC/IC/MIDC/MIDCS07676/MIDCS07676-1.pdf?src-supplier=IHS+Markit, ComponentLink2Description=http://www.farnell.com/cad/1737268.pdf?src-supplier=Element14, ComponentLink2URL=http://www.farnell.com/cad/1737268.pdf?src-supplier=Element14, ComponentLink3Description=https://datasheet.octopart.com/61300511121-W%C3%BCrth-Elektronik-datasheet-21154836.pdf?src-supplier=Element14, ComponentLink3URL=https://datasheet.octopart.com/61300511121-W%C3%BCrth-Elektronik-datasheet-21154836.pdf?src-supplier=Element14, ComponentLink4Description=https://katalog.we-online.de/em/datasheet/6130xx11121.pdf?src-supplier=Digikey, ComponentLink4URL=https://katalog.we-online.de/em/datasheet/6130xx11121.pdf?src-supplier=Digikey, Connector Type="BOARD CONNECTOR", Contact Finish - Mating=GOLD, Contact Finish - Termination="Gold (Au) - with Nickel (Ni) barrier", Contact Gender=Male, Contact Material="Copper Alloy", Contact Pattern=RECTANGULAR, Contact Style="SQ PIN-SKT", Insulation Material=Polybutylene, JESD-609 Code=e4, Manufacturer Part Number=61300511121, Mating Contact Pitch=0.1inch, Mounting Option 1=LOCKING, Mounting Style=STRAIGHT, Mounting Technology=Board, Number Of Connectors=1, Number of Contacts=5, Number of Rows Loaded=1, PCB Contact Pattern=RECTANGULAR, Pricing="125=0.136, 500=0.116, 2500=0.11, 5000=0.102 (EUR)", Reach SVHC Compliant=Yes, Reference Standard=UL, Reliability=COMMERCIAL, RoHS=Yes, RoHS Compliant=Yes, Stock=1085, Supplier=Rs, Terminal Length=0.118inch, Terminal Pitch=2.54mm, Termination=Solder
J10 J11 K1 K2 K3 K5 K7: "Board Connector, 3 Contact(s), 1 Row(s), Male, Straight, 0.1 inch Pitch, Solder Terminal, Locking, Black Insulator, Plug", Contact Resistance=20mR, Dielectric Withstanding Voltage (AC)=500V, Insulation Color=Black, Insulation Resistance=1GR, Manufacturer="Wurth Electronics", Max Operating Temperature=125°C, Min Operating Temperature=-40°C, Rated Current (Signal)=3A, Supplier Part Number=8281585P, Body Breadth=0.1inch, Body Depth=0.1inch, Body Length=0.3inch, Body/Shell Style=PLUG, Category=Connectors, ComponentLink1Description=https://datasheet.ciiva.com:443/pdfs/VipMasterIC/IC/MIDC/MIDCS07676/MIDCS07676-1.pdf?src-supplier=IHS+Markit, ComponentLink1URL=https://datasheet.ciiva.com:443/pdfs/VipMasterIC/IC/MIDC/MIDCS07676/MIDCS07676-1.pdf?src-supplier=IHS+Markit, ComponentLink2Description=http://www.farnell.com/cad/1737268.pdf?src-supplier=Element14, ComponentLink2URL=http://www.farnell.com/cad/1737268.pdf?src-supplier=Element14, ComponentLink3Description=https://datasheet.octopart.com/61300311121-W%C3%BCrth-Elektronik-datasheet-21154836.pdf?src-supplier=Element14, ComponentLink3URL=https://datasheet.octopart.com/61300311121-W%C3%BCrth-Elektronik-datasheet-21154836.pdf?src-supplier=Element14, ComponentLink4Description=https://katalog.we-online.de/em/datasheet/6130xx11121.pdf?src-supplier=Digikey, ComponentLink4URL=https://katalog.we-online.de/em/datasheet/6130xx11121.pdf?src-supplier=Digikey, Connector Type="BOARD CONNECTOR", Contact Finish - Mating=GOLD, Contact Finish - Termination="Gold (Au) - with Nickel (Ni) barrier", Contact Gender=Male, Contact Material="Copper Alloy", Contact Pattern=RECTANGULAR, Contact Style="SQ PIN-SKT", Insulation Material=Polybutylene, JESD-609 Code=e4, Manufacturer Part Number=61300311121, Mating Contact Pitch=0.1inch, Mounting Option 1=LOCKING, Mounting Style=STRAIGHT, Mounting Technology=Board, Number Of Connectors=1, Number of Contacts=3, Number of Rows Loaded=1, PCB Contact Pattern=RECTANGULAR, Pricing="25=0.11, 50=0.088, 100=0.082, 250=0.078 (EUR)", Reach SVHC Compliant=Yes, Reference Standard=UL, Reliability=COMMERCIAL, RoHS=Yes, RoHS Compliant=Yes, Stock=3960, Supplier=Rs, Terminal Length=0.118inch, Terminal Pitch=2.54mm, Termination=Solder
K8: "Board Connector, 4 Contact(s), 1 Row(s), Male, Straight, 0.1 inch Pitch, Solder Terminal, Locking, Black Insulator, Plug", Contact Resistance=20mR, Dielectric Withstanding Voltage (AC)=500V, Insulation Color=Black, Insulation Resistance=1GR, Manufacturer="Wurth Electronics", Max Operating Temperature=125°C, Min Operating Temperature=-40°C, Rated Current (Signal)=3A, Supplier Part Number=8281594P, Body Breadth=0.1inch, Body Depth=0.1inch, Body Length=0.4inch, Body/Shell Style=PLUG, Category="Headers and Wire Housings", ComponentLink1Description=https://datasheet.ciiva.com:443/pdfs/VipMasterIC/IC/MIDC/MIDCS07676/MIDCS07676-1.pdf?src-supplier=IHS+Markit, ComponentLink1URL=https://datasheet.ciiva.com:443/pdfs/VipMasterIC/IC/MIDC/MIDCS07676/MIDCS07676-1.pdf?src-supplier=IHS+Markit, ComponentLink2Description=http://www.farnell.com/cad/1737268.pdf?src-supplier=Element14, ComponentLink2URL=http://www.farnell.com/cad/1737268.pdf?src-supplier=Element14, ComponentLink3Description=https://datasheet.octopart.com/61300411121-W%C3%BCrth-Elektronik-datasheet-21154836.pdf?src-supplier=Element14, ComponentLink3URL=https://datasheet.octopart.com/61300411121-W%C3%BCrth-Elektronik-datasheet-21154836.pdf?src-supplier=Element14, ComponentLink4Description=https://katalog.we-online.de/em/datasheet/6130xx11121.pdf?src-supplier=Digikey, ComponentLink4URL=https://katalog.we-online.de/em/datasheet/6130xx11121.pdf?src-supplier=Digikey, Connector Type="BOARD CONNECTOR", Contact Finish - Mating=GOLD, Contact Finish - Termination="Gold (Au) - with Nickel (Ni) barrier", Contact Gender=Male, Contact Material="Copper Alloy", Contact Pattern=RECTANGULAR, Contact Style="SQ PIN-SKT", Insulation Material=Polybutylene, JESD-609 Code=e4, Manufacturer Part Number=61300411121, Mating Contact Pitch=0.1inch, Mounting Option 1=LOCKING, Mounting Style=STRAIGHT, Mounting Technology=Board, Number Of Connectors=1, Number of Contacts=4, Number of Rows Loaded=1, PCB Contact Pattern=RECTANGULAR, Pricing="250=0.076, 500=0.074, 2500=0.072, 5000=0.07 (EUR)", Reach SVHC Compliant=Yes, Reference Standard=UL, Reliability=COMMERCIAL, RoHS=Yes, RoHS Compliant=Yes, Stock=2615, Supplier=Rs, Terminal Length=0.118inch, Terminal Pitch=2.54mm, Termination=Solder
L1: "General Purpose Inductor, 10000uH, 10%, 1 Element, Ferrite-Core", DC Resistance (DCR)=34R, Inductance-Nom (L)=10000uH, Inductor Application="POWER INDUCTOR", Inductor Type="GENERAL PURPOSE INDUCTOR", Manufacturer=Coilcraft, Manufacturer Series=RFB, Max Current Rating=100mA, Max Operating Temperature=85°C, Min Operating Temperature=-40°C, Package Diameter=8.8mm, Package Length=7.5mm, Package Style=RadialMeter, Self Resonant Frequency=700kHz, Supplier Part Number=994-RFB0807-103L, Test Frequency=100kHz, Tolerance=10%, Category="Fixed Inductors", Channels=1, ComponentLink1Description=https://datasheet.ciiva.com:443/pdfs/VipMasterIC/IC/COLC/COLC-S-A0001039031/COLC-S-A0000243710-1.pdf?src-supplier=IHS+Markit, ComponentLink1URL=https://datasheet.ciiva.com:443/pdfs/VipMasterIC/IC/COLC/COLC-S-A0001039031/COLC-S-A0000243710-1.pdf?src-supplier=IHS+Markit, ComponentLink2Description=http://www.farnell.com/datasheets/1870388.pdf?src-supplier=Farnell, ComponentLink2URL=http://www.farnell.com/datasheets/1870388.pdf?src-supplier=Farnell, ComponentLink3Description=http://www.farnell.com/datasheets/1870388.pdf?src-supplier=Element14, ComponentLink3URL=http://www.farnell.com/datasheets/1870388.pdf?src-supplier=Element14, Construction=Cylindrical, Core Material=Ferrite, JESD-609 Code=e2, Lead Diameter=0.6mm, Lead Length=4mm, Lead Pitch=5mm, Manufacturer Part Number=RFB0807-103L, Packaging=Tray, Pins=2, Pricing="1=1.46, 10=1.46, 50=1.46, 100=1.46, 1000=0.714, 10000=0.664 (USD)", Reach SVHC Compliant=Yes, Reference Standard=AEC-Q200, RoHS=Yes, RoHS Compliant=Yes, Series=RFB, Shape/Size Description="CYLINDRICAL PACKAGE", Shielding=Unshielded, Stock=337, Supplier=Mouser, Surface Mount=No, Terminal Finish=Tin, Terminal Placement=Radial, Termination=Wire
L2: "Data Line Filter, 2 Function(s), 10A, 4 Pin(s)", Current Rating=10A, DC Resistance-Max=10mR, Manufacturer=Laird, Category="Common Mode Chokes", Channels=2, ComponentLink1Description=https://datasheet.ciiva.com:443/pdfs/VipMasterIC/IC/LATE/LATES02109/LATES02109-1.pdf?src-supplier=IHS+Markit, ComponentLink1URL=https://datasheet.ciiva.com:443/pdfs/VipMasterIC/IC/LATE/LATES02109/LATES02109-1.pdf?src-supplier=IHS+Markit, Filter Type="DATA LINE FILTER", Height=9.32mm, JESD-609 Code=e3, Length=11.38mm, Manufacturer Part Number=CM2545X171R-10, Mounting Technology="Surface Mount", Output Impedance=170R, Pricing="400=1.14668, 800=1.12312, 1600=1.09956, 2400=1.076, 3200=1.05244, 4000=1.02887, 40000=0.70911 (USD)", Reach SVHC Compliant=Yes, RoHS=Yes, RoHS Compliant=Yes, Stock=12000, Supplier=Avnet, Supplier Part Number=CM2545X171R-10, Terminal Finish=Nickel, Width=6.3mm
R1 R2 R3 R4 R5 R6 R7 R8 R9 R10 R11 R12 R13 R14 R15 R16 R17 R18 R19 R20 R21 R22 R23 R24 R25: library part RES_0805, "SMD size 0805 Generic."
RE1: "Power/Signal Relay, 2 Form C, DPDT, Momentary, 0.08A (Coil), 5VDC (Coil), 400mW (Coil), 8A (Contact), 30VDC (Contact), DC Input, Random, AC Output, Through Hole-Straight Mount", Coil Current(DC)-Max=80mA, Coil Operate Voltage(DC)=3.5V, Coil Power=400mW, Coil Release Voltage(DC)=500mV, Coil Resistance=62R, Coil Voltage(DC)-Max=5V, Contact AC Max Power Rating R Load=2000VA@400VAC, Contact AC Max Rating R Load=8A@250VAC, Contact Current(AC)-Max=8A, Contact DC Max Rating R Load=8A@30VDC, Contact Voltage(AC)-Max=250V, Contact Voltage(DC)-Max=30V, Dielectric Strength Between Coil and Contacts=5000Vrms, Dielectric Strength Between Open Contacts=1000Vrms, Manufacturer="TE Connectivity", Max Operating Temperature=85°C, Min Operating Temperature=-40°C, Supplier Part Number=17C6452, Body Breadth=12.7inch, Body Height=15.7mm, Body Length or Diameter=29mm, Category="Power Relays", Coil Voltage-Nom=5V, Coil/Input Supply Type=DC, ComponentLink1Description=https://datasheet.ciiva.com:443/pdfs/VipMasterIC/IC/TYEL/TYEL-S-A0008743874/TYEL-S-A0008744021-1.pdf?src-supplier=IHS+Markit, ComponentLink1URL=https://datasheet.ciiva.com:443/pdfs/VipMasterIC/IC/TYEL/TYEL-S-A0008743874/TYEL-S-A0008744021-1.pdf?src-supplier=IHS+Markit, ComponentLink2Description=https://datasheet.ciiva.com/2408/eng-ds-rt2pb-0411-2408708.pdf?src-supplier=Digikey, ComponentLink2URL=https://datasheet.ciiva.com/2408/eng-ds-rt2pb-0411-2408708.pdf?src-supplier=Digikey, Contact Current(DC)-Max=8A, Contact/Output Supply Type=AC, Electrical Life=30000Cycles, End Contact Material=Agni90/10, Input Switching Control Type=Random, Manufacturer Part Number=RT424005F, Mounting Technology="Through Hole", Operate Time=15ms, Packaging=Box, PCB Hole Count=8, Pins=8, Pricing="1=6.31, 10=5.95, 25=5.33, 50=5.1, 100=4.86 (USD)", Reach SVHC Compliant=Yes, Reference Standard=UL, Relay Action=MOMENTARY, Relay Form="2 FORM C", Relay Function=DPDT, Relay Type="POWER/SIGNAL RELAY", Release Time=6ms, RoHS=Yes, RoHS Compliant=Yes, Sealing="FLUX FREE SEALED", Stock=1500, Supplier=Avnet, Terminal Length=0.0036inch, Termination=Solder, Weight=13g
T1 T3: "Small Signal Bipolar Transistor, 0.1A I(C), 45V V(BR)CEO, 1-Element, NPN, Silicon, TO-92", Collector-emitter Voltage-Max=45V, DC Current Gain-Min (hFE)=420, Frequency=300MHz, Manufacturer="ON Semiconductor", Max Collector Current=100mA, Max Operating Temperature=150°C, Package Body Material=Plastic, Package Shape=Round, Package Style=CYLINDRICALMeter, Peak Reflow Temperature (Cel)=260°C, Power Dissipation-Max (Abs)=625mW, Time @ Peak Reflow Temperature-Max (s)=40s, Category=BJTs, ComponentLink1Description=https://datasheet.ciiva.com:443/pdfs/VipMasterIC/IC/ONSM/ONSMS24464/ONSMS24464-1.pdf?src-supplier=IHS+Markit, ComponentLink1URL=https://datasheet.ciiva.com:443/pdfs/VipMasterIC/IC/ONSM/ONSMS24464/ONSMS24464-1.pdf?src-supplier=IHS+Markit, ComponentLink2Description=https://datasheet.ciiva.com/977/bc546-d-977051.pdf?src-supplier=Digikey, ComponentLink2URL=https://datasheet.ciiva.com/977/bc546-d-977051.pdf?src-supplier=Digikey, JEDEC-95 Code=TO-92, JESD-30 Code=O-PBCY-T3, JESD-609 Code=e1, Manufacturer Part Number=BC547CG, Number of Elements=1, Pins=3, Polarity/Channel Type=NPN, Pricing="1=0.214, 25=0.189, 100=0.169, 500=0.16, 1000=0.107, 2500=0.092, 5000=0.08, 10000=0.064, 25000=0.062 (USD)", Qualification Status="Not Qualified", Reach SVHC Compliant=Yes, RoHS=Yes, RoHS Compliant=Yes, Stock=41483, Supplier="Arrow Electronics", Supplier Part Number=BC547CG, Surface Mount=No, Terminal Finish=Copper, Terminal Form="Through Hole", Terminal Position=BOTTOM, Transistor Application=AMPLIFIER, Transistor Element Material=SILICON
T2: "Small Signal Bipolar Transistor, 1.2A I(C), 30V V(BR)CEO, 1-Element, PNP, Silicon", Collector-emitter Voltage-Max=30V, DC Current Gain-Min (hFE)=20000, Frequency=220MHz, Manufacturer="ON Semiconductor / Fairchild", Max Collector Current=1.2A, Max Operating Temperature=150°C, Package Body Material=Plastic, Package Shape=Rectangular, Package Style="SMALL OUTLINEMeter", Power Dissipation-Max (Abs)=300mW, Supplier Part Number=8096588, Category=BJTs, ComponentLink1Description=https://datasheet.ciiva.com:443/pdfs/VipMasterIC/IC/ONSM/ONSM-S-A0003590120/ONSM-S-A0003585143-1.pdf?src-supplier=IHS+Markit, ComponentLink1URL=https://datasheet.ciiva.com:443/pdfs/VipMasterIC/IC/ONSM/ONSM-S-A0003590120/ONSM-S-A0003585143-1.pdf?src-supplier=IHS+Markit, ComponentLink2Description=https://datasheet.ciiva.com/5770/276230-5770438.pdf?src-supplier=Avnet, ComponentLink2URL=https://datasheet.ciiva.com/5770/276230-5770438.pdf?src-supplier=Avnet, ComponentLink3Description=https://datasheet.ciiva.com/5770/276230-5770438.pdf?src-supplier=Farnell, ComponentLink3URL=https://datasheet.ciiva.com/5770/276230-5770438.pdf?src-supplier=Farnell, ComponentLink4Description=https://datasheet.ciiva.com/4458/bcv26-104632-4458944.pdf?src-supplier=Mouser, ComponentLink4URL=https://datasheet.ciiva.com/4458/bcv26-104632-4458944.pdf?src-supplier=Mouser, ComponentLink5Description=https://datasheet.ciiva.com/7972/276230-7972620.pdf?src-supplier=Element14, ComponentLink5URL=https://datasheet.ciiva.com/7972/276230-7972620.pdf?src-supplier=Element14, ComponentLink6Description=https://datasheet.ciiva.com/7972/276230-7972621.pdf?src-supplier=Element14, ComponentLink6URL=https://datasheet.ciiva.com/7972/276230-7972621.pdf?src-supplier=Element14, ComponentLink7Description=https://datasheet.ciiva.com/6360/bcv26-6360908.pdf?src-supplier=Digikey, ComponentLink7URL=https://datasheet.ciiva.com/6360/bcv26-6360908.pdf?src-supplier=Digikey, ComponentLink8Description=https://datasheet.ciiva.com/6360/bcv26-6360909.pdf?src-supplier=Digikey, ComponentLink8URL=https://datasheet.ciiva.com/6360/bcv26-6360909.pdf?src-supplier=Digikey, ComponentLink9Description=https://datasheet.ciiva.com/6360/bcv26-6360911.pdf?src-supplier=Digikey, ComponentLink9URL=https://datasheet.ciiva.com/6360/bcv26-6360911.pdf?src-supplier=Digikey, JESD-30 Code=R-PDSO-G3, Manufacturer Part Number=BCV26, Moisture Sensitivity Level=1, Number of Elements=1, Pins=3, Polarity/Channel Type=PNP, Pricing="3000=0.0435, 9000=0.0419, 15000=0.0412, 60000=0.0393, 90000=0.0381 (USD)", Qualification Status="Not Qualified", Reach SVHC Compliant=Yes, RoHS=Yes, RoHS Compliant=Yes, Stock=27000, Supplier="Future Electronics", Surface Mount=Yes, Terminal Form="Gull Wing", Terminal Position=DUAL, Transistor Element Material=SILICON
T4: "Mosfet Transistor, IRF9Z34NPBF, generic."
T5: library part BC547CG, "Small Signal Bipolar Transistor, 0.1A I(C), 45V V(BR)CEO, 1-Element, NPN, Silicon, TO-92", Collector-emitter Voltage-Max=45V, DC Current Gain-Min (hFE)=420, Frequency=300MHz, Manufacturer="ON Semiconductor", Max Collector Current=100mA, Max Operating Temperature=150°C, Package Body Material=Plastic, Package Shape=Round, Package Style=CYLINDRICALMeter, Peak Reflow Temperature (Cel)=260°C, Power Dissipation-Max (Abs)=625mW, Time @ Peak Reflow Temperature-Max (s)=40s, Category=BJTs, ComponentLink1Description=https://datasheet.ciiva.com:443/pdfs/VipMasterIC/IC/ONSM/ONSMS24464/ONSMS24464-1.pdf?src-supplier=IHS+Markit, ComponentLink1URL=https://datasheet.ciiva.com:443/pdfs/VipMasterIC/IC/ONSM/ONSMS24464/ONSMS24464-1.pdf?src-supplier=IHS+Markit, ComponentLink2Description=https://datasheet.ciiva.com/977/bc546-d-977051.pdf?src-supplier=Digikey, ComponentLink2URL=https://datasheet.ciiva.com/977/bc546-d-977051.pdf?src-supplier=Digikey, JEDEC-95 Code=TO-92, JESD-30 Code=O-PBCY-T3, JESD-609 Code=e1, Manufacturer Part Number=BC547CG, Number of Elements=1, Pins=3, Polarity/Channel Type=NPN, Pricing="1=0.214, 25=0.189, 100=0.169, 500=0.16, 1000=0.107, 2500=0.092, 5000=0.08, 10000=0.064, 25000=0.062 (USD)", Qualification Status="Not Qualified", Reach SVHC Compliant=Yes, RoHS=Yes, RoHS Compliant=Yes, Stock=41483, Supplier="Arrow Electronics", Supplier Part Number=BC547CG, Surface Mount=No, Terminal Finish=Copper, Terminal Form="Through Hole", Terminal Position=BOTTOM, Transistor Application=AMPLIFIER, Transistor Element Material=SILICON
ZD1: library part MMBZ5231BLT1G, "Zener Diode, 5.1V V(Z), 5.1%, 0.225W, Silicon, Unidirectional, TO-236AB", Manufacturer="ON Semiconductor", Max Operating Temperature=150°C, Max Power Dissipation=225mW, Min Operating Temperature=-65°C, Package Body Material=Plastic, Package Shape=Rectangular, Package Style="SMALL OUTLINEMeter", Peak Reflow Temperature (Cel)=260°C, Reference Voltage-Nom=5.1V, Supplier Part Number=8481582, Test Current=20mA, Time @ Peak Reflow Temperature-Max (s)=40s, Voltage Tol-Max=5.1%, Category="Zener Diodes", ComponentLink1Description=https://datasheet.ciiva.com:443/pdfs/VipMasterIC/IC/ONSM/ONSM-S-A0002808860/ONSM-S-A0002808860-1.pdf?src-supplier=IHS+Markit, ComponentLink1URL=https://datasheet.ciiva.com:443/pdfs/VipMasterIC/IC/ONSM/ONSM-S-A0002808860/ONSM-S-A0002808860-1.pdf?src-supplier=IHS+Markit, Diode Element Material=SILICON, Diode Type=ZENER, Dynamic Impedance-Max=17R, JEDEC-95 Code=TO-236AB, JESD-30 Code=R-PDSO-G3, JESD-609 Code=e3, Manufacturer Part Number=MMBZ5231BLT1G, Moisture Sensitivity Level=1, Number of Elements=1, Pins=3, Polarity=Unidirectional, Pricing="3000=0.014, 12000=0.0134, 30000=0.013, 75000=0.0127, 120000=0.0121 (USD)", Qualification Status="Not Qualified", Reach SVHC Compliant=Yes, RoHS=Yes, RoHS Compliant=Yes, Stock=543000, Supplier="Future Electronics", Surface Mount=Yes, Technology=ZENER, Terminal Finish=Tin, Terminal Form="Gull Wing", Terminal Position=DUAL

## Via types
v1: diameter 1.27, hole 0.711, Top Layer to Bottom Layer, 42 vias
v2: diameter 3.27, hole 1.811, Top Layer to Bottom Layer, 4 vias

## Nets (pads, with @x,y where several pads share a name; then routed paths per layer and width w, separated by ;. In a path a pad name is that pad's centre, name@x,y a point inside that pad or via, vN(x,y) a via of type N, cw(c..) or ccw(c..) an arc to the next point about the centre after c; other vN are vias at no path point)
+5: C2.N C3.1 C4.1 C5.1 C6.N C6.P C7.1 C7.2 C8.N C8.P C9.N C15.1 C16.2 C17.2 C18.1 CN1.1 CN6.2 CN7.2 D1.1 D2.1 IC1.2 IC1.6 IC1.18 IC1.32 IC2A.8 IC2B.8 IC4.2 IC4.3 J1A.1 J1A.5 J1B.1 J1B.5 J11.3 K2.1 K2.3 K3.1 K7.1 K7.2 K8.1 K8.4 L2.2 R1.2 R2.2 R3.1 R10.1 R13.2 R16.1 R17.1 R19.1 R22.2 R25.2 RE1.21 RE1.A1 T1.3 T2.3 T5.3 ZD1.1 | length 540.9
  Top Layer w0.254: CN7.2 -120.379,61.121 -120.379,48.879 CN6.2 -117.559,46.059 -117.559,39.584 C4.1 ; L2.2 -116.73,24.245 C5.1 C4.1 ; C15.1 -109.827,38.802 -109.207,38.802 -109.009,39 C16.2 -106.252,38.277 -102.698,38.277 C17.2 ; C3.1 -107.702,33.273 -111.248,33.273 C4.1 ; RE1.21 -104.15,41.175 C17.2 ; C7.1 C7.2 ; IC1.18 -94.42,26.18 -94.42,33.395 C7.2 ; RE1.A1 -76.5,46.4 C6.P ; K3.1 -71.54,6.41 IC1.32 ; C6.N -71.5,38.55 R19.1 -73.05,34 ; K2.3 -64.54,34.59 R22.2 -66.753,33.197 -70.097,33.197 R25.2 -73.05,34 ; IC1.6 -61.76,25.716 -60.238,27.238 -60.238,28.222 K2.1 ; R2.2 -51.861,36.189 -49.761,36.189 -49.761,35.711 R1.2 ; IC1.2 -51,24.6 K7.2 ; R3.1 R1.2 ; J1B.1 -43.95,3.87 -43.95,12.572 -43,13.523 ZD1.1 -43,17.246 -41.359,18.887 -41.359,22.682 -43.874,25.196 -47.176,25.196 -48.46,26.48 K7.1 ; IC2B.8 -38.81,51.69 C2.N ; IC2A.8 -41.486,25.81 ; T5.3 -31.92,10.46 J1B.5 ; C9.N -32.939,32.561 -43.545,32.561 -44.636,31.47 -44.636,28.96 -41.486,25.81 ; D1.1 -27.313,39 -28.71,40.397 -28.71,54.21 C2.N ; CN1.1 -32.5,59.5 C2.N ; J11.3 -16.01,5.01 -16.01,21 D2.1 -15.38,21 -14.816,21.564 -14.816,29.183 -9.73,34.27 T1.3 ; v1(-11.972,68.3) -10.6,68.3 -9.279,69.621 T2.3 ; C17.2 -100.253,40.722 -96.747,40.722 C18.1 ; C7.2 C18.1 ; C18.1 -94.025,38 R13.2 -89.337,38.613 -89.337,38.836 -88.829,39.344 -84.031,39.344 -84,39.313 R10.1 -75.05,34 R16.1 -73.05,34 ; R1.2 -48.46,34.41 K7.1 ; K7.1 -45.05,29 R17.1 -42.05,25.81 -41.486,25.81
  Bottom Layer w0.254: CN6.2 -114.204,47.5 -114.054,47.65 -105.55,47.65 RE1.21 ; K8.1 -97.41,1.6 -96.459,1.533 -96.206,1.279 ccw(c-95.27,2) -94.366,1.24 -94.315,1.292 -93.685,1.292 -93.634,1.24 ccw(c-92.73,2) -91.742,1.353 -91.47,1.625 K8.4 -85.07,1.625 -84.264,0.819 -82.817,0.819 -82.451,1.185 -81.855,1.185 ccw(c-81,2) -80.096,1.24 -80.045,1.292 -79.415,1.292 -79.364,1.24 ccw(c-78.46,2) -77.472,1.353 -77.2,1.625 -72.659,1.625 -71.94,1.4 K3.1 -68.883,3.657 -61.737,3.657 J1A.5 -58.88,3.2 -51.12,3.2 J1A.1 J1B.1 -40.88,3.2 -33.12,3.2 J1B.5 J11.3 ; C6.P -76.343,43.843 -74.13,43.843 -73.973,44 C6.N C8.P C8.N -58.55,44.7 IC4.3 IC4.2 -42.89,49.81 IC2B.8 ; K2.3 -63.352,27.812 -60.648,27.812 K2.1 -57.464,30.996 -52.996,30.996 K7.2 K7.1 ; CN1.1 -22,71.099 -21.522,71.577 -15.248,71.577 v1(-11.972,68.3)
+12: C2.P C3.2 C4.2 IC1.5 IC1.31 L1.2 | length 217.4
  Top Layer w0.254: C4.2 -109.304,34.721 -105.746,34.721 C3.2 -105.025,33.235 v1(-106.891,31.368) ; v1(-58.53,15.722) -59.22,16.412 IC1.5 -59.22,26.106 -57.59,27.736 -57.59,28.135 -54.263,31.462 -54.263,37.083 -47.049,44.297 -47.049,46.951 C2.P
  Bottom Layer w0.254: v1(-106.891,31.368) -101.71,26.187 -89.289,26.187 -88.222,25.12 -88.222,23.342 -87.816,22.936 -71.444,22.936 -70.944,22.436 -60.784,22.436 IC1.5 ; IC1.31 -67.308,13.182 -16.682,13.182 ; v1(-58.53,15.722) -58.343,15.535 -19.035,15.535 -16.682,13.182 ; L1.2 -16.682,13.182
NetC1_1: C1.1 K1.2 | length 17.5
  Top Layer w0.254: v1(-101.975,31.705) C1.1
  Bottom Layer w0.254: v1(-101.975,31.705) -89.819,31.705 -89,30.886 K1.2
NetC1_2: C1.2 D1.2 IC1.29 | length 165.7
  Top Layer w0.254: C1.2 -100.025,31.216 -101.524,29.717 -102.269,29.717 -102.802,29.184 -102.802,23.367 -102.151,22.716 -102.151,4.378 -96.858,-0.915 -74.608,-0.915 -73.389,0.304 -73.389,9.372 -73.643,9.626 -75.944,9.626 IC1.29 ; D1.2 -23.91,39 v1(-23.91,41.376)
  Bottom Layer w0.254: IC1.29 -77,7.848 -76.666,7.513 -73.723,7.513 -73.389,7.848 -73.389,8.915 -65.413,16.89 -35.776,16.89 -34.929,16.043 -24.398,16.043 -20.046,20.395 -20.046,37.512 v1(-23.91,41.376)
NetC5_2: C5.2 IC1.17 L1.1 | length 128.5
  Top Layer w0.254: C5.2 -108.568,27.543 v1(-108.568,23.494)
  Bottom Layer w0.254: v1(-108.568,23.494) -107.501,22.428 -105.088,22.428 ; IC1.17 -91.272,22.428 -105.088,22.428 ; L1.1 -20.874,9.626 -50.036,9.626 -50.544,10.134 -61.908,10.134 -63.026,9.016 -63.381,7.492 -65.421,7.492 -65.908,7.005 -82.605,7.005 -83.447,7.848 -83.447,13.436 -83.955,13.944 -103.945,13.944 -105.342,15.341 -105.342,22.174 -105.088,22.428
NetC9_P: C9.P F1.2 IC4.1 | length 51.3
  Top Layer w0.254: IC4.1 -36.5,35.74 C9.P ; v1(-5.013,24.726) -3.776,24.726 -3,23.95
  Bottom Layer w0.254: C9.P -35.499,35.001 -31.809,35.001 -24.418,42.392 -23.452,42.392 -22.894,41.833 -22.894,41.376 -15.832,34.315 -15.832,31.495 -13.013,28.676
NetC10_N: C10.N C11.1 ENC1.2 ENC1.B IC3.1 J9A.5 J9B.5 | length 117
  Top Layer w0.254: J9B.5 -103.79,73 C11.1 -100.685,73.948 -100.141,74.492 -81.359,74.492 -79.485,72.618 -79.485,55.535 IC3.1 ; ENC1.2 -24.7,52.7 ENC1.B
  Bottom Layer w0.254: J9A.5 J9B.5 ; IC3.1 -75.442,54.508 -45.702,54.508 C10.N -43.21,57 ENC1.2
NetC10_P: C10.P C11.2 C12.2 C13.1 C14.2 IC3.16 J9A.1 J9B.1 R4.1 R5.2 R6.2 | length 93.7
  Top Layer w0.254: J9B.1 -103.816,62.814 -99.549,62.814 C13.1 -96.016,64.719 -94.928,64.719 R6.2@-93,62.791 ; C14.2 -99.877,66.192 -96.708,66.192 R4.1 ; C11.2 C12.2 -95.95,69.05 R4.1 ; v1(-89.035,57.962) -89.962,57.962 R5.2 R6.2@-93,62.791 ; R4.1 -94.9,64.9 R6.2 R6.2@-93,62.791
  Bottom Layer w0.254: J9A.1 J9B.1 ; v1(-89.035,57.962) -85.225,61.772 -67.782,61.772 IC3.16 -62.01,56 C10.P
NetC12_1: C12.1 ENC1.C J9A.2 R4.2 | length 194.4
  Top Layer w0.254: J9A.2 -104.669,58.419 -100.338,58.419 -95.106,53.187 -95.106,50.52 -93.963,49.377 -92.032,49.377 -88.019,53.39 -88.019,63.019 R4.2 -94,69 C12.1
  Bottom Layer w0.254: J9A.2 -111.895,63.275 -111.895,61.188 -111.387,60.68 -103.158,60.68 -98.433,65.404 -6.231,65.404 -4.631,63.804 -4.631,55.473 -11.895,48.209 -17.709,48.209 ENC1.C
NetC13_2: C13.2 ENC1.1 J9A.4 R6.1 | length 126.3
  Top Layer w0.254: J9A.4 -111.895,68.355 -111.895,66.268 -111.387,65.76 -108.187,65.76 -106.053,63.626 -106.053,61.188 -105.444,60.578 -102.107,60.578 C13.2 -99.873,61.188 -96.712,61.188 R6.1 -94.219,62.319 -94.219,51.818 v1(-92.794,50.393)
  Bottom Layer w0.254: v1(-92.794,50.393) -81.923,50.393 -77.3,55.016 -46.719,55.016 -41.461,60.274 -13.732,60.274 -13.3,59.842 ENC1.1
NetC14_1: C14.1 ENC1.A J9A.3 R5.1 | length 184.6
  Top Layer w0.254: J9A.3 -109.71,68 -105.338,68 cw(c-104.71,67) -104.082,68 -99.735,68 -99.661,67.926 C14.1 ; v1(-99.932,59.969) -95.931,59.969 R5.1